# Altium PCB PCB.PcbDoc
Units mil, origin at the board's own origin, x right, y up, seen from the top; angles counter-clockwise.
Board outline 1710 x 660 mil, 2 copper layers (Top Layer, Bottom Layer); 11 components, 8 nets, 29 pads, 0 vias.
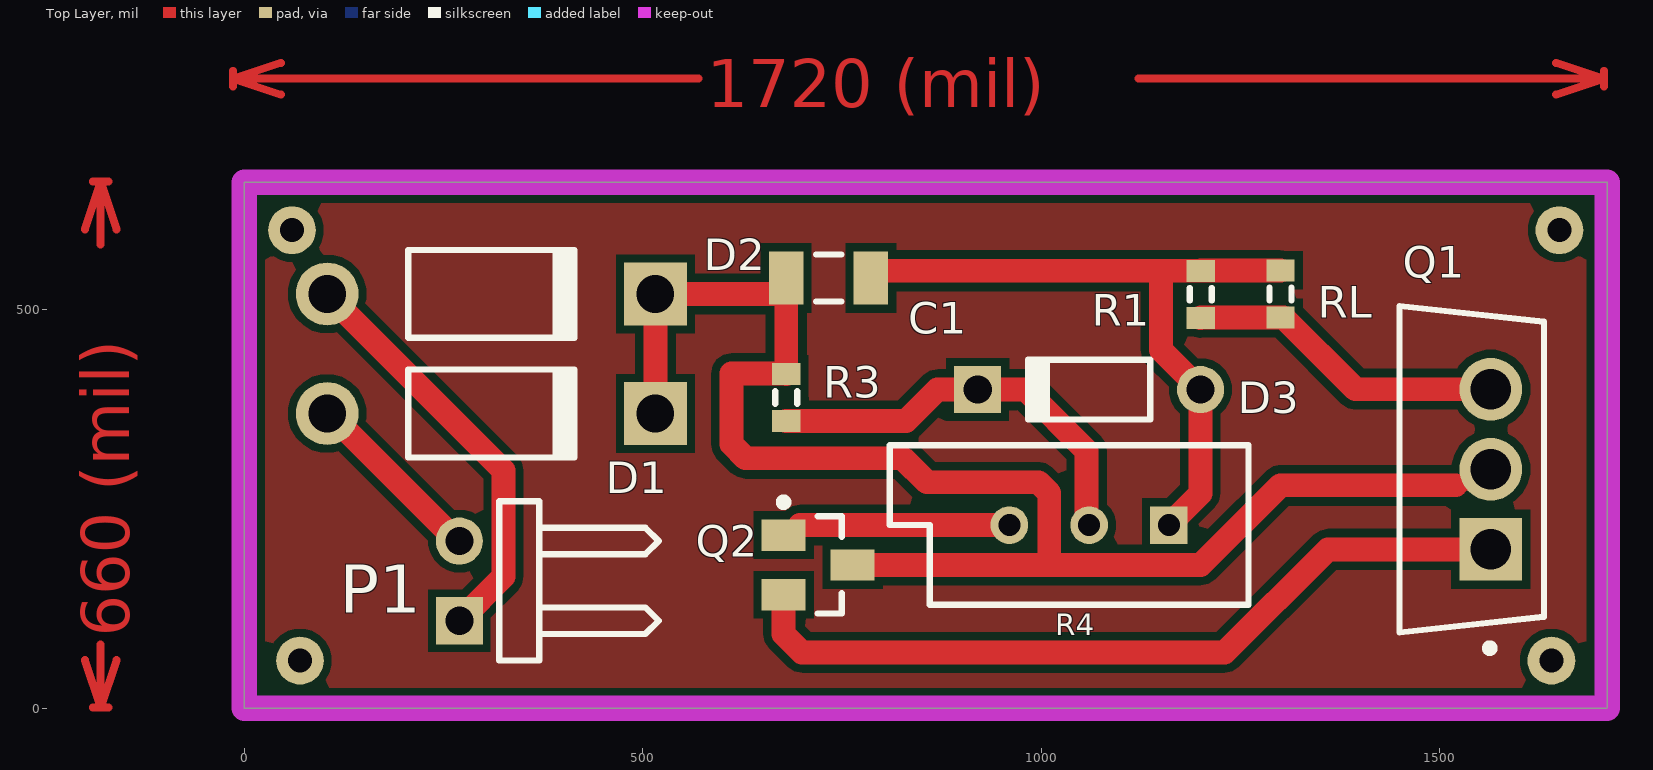
[diagram p0: Top Layer view]
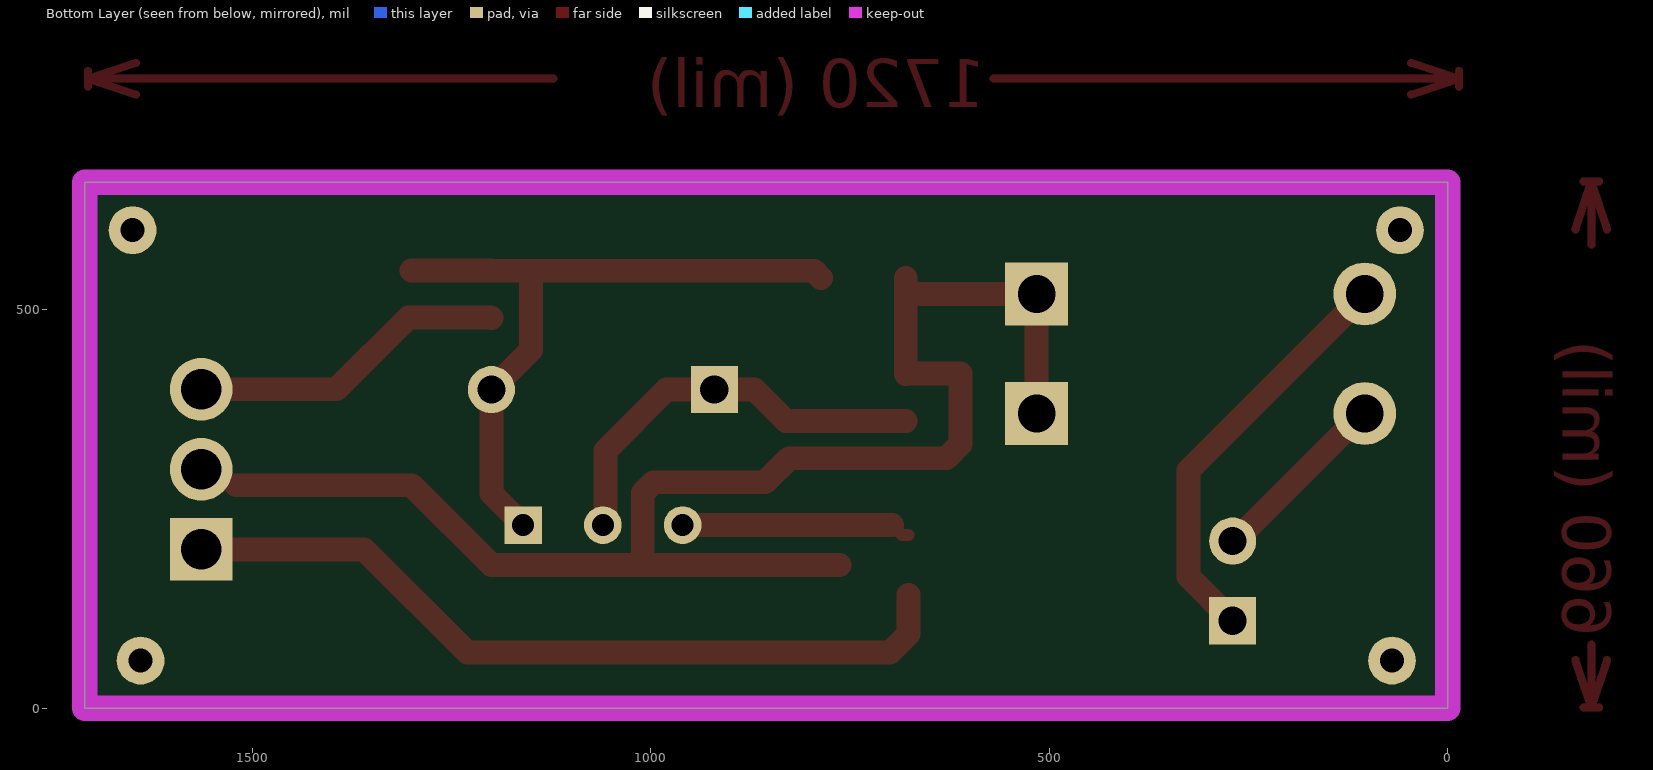
[diagram p1: Bottom Layer view, seen from below]

## Layer stack, top to bottom
Top Solder: solder mask 0.4, Solder Resist, Dk 3.5
Top Layer: signal copper 1.4
Dielectric 1: dielectric 12.6, FR-4, Dk 4.8
Bottom Layer: signal copper 1.4
Bottom Solder: solder mask 0.4, Solder Resist, Dk 3.5

## Board outline
0,0 0,660 1710,660 1710,0

## Design rules (kind name [scope] priority, off if disabled: settings)
Clearance [All] p1: gap=10 ignorepadtopadclearanceinfootprint=FALSE
PolygonConnect [All] p1: connectstyle=Relief reliefconductorwidth=10 reliefentries=4 polygonreliefangle="90 Angle" airgapwidth=10
RoutingVias [All] p1: holewidth=28 width=50 viastyle="Through Hole" minholewidth=28 minwidth=50 maxholewidth=28 maxwidth=50
SolderMaskExpansion [All] p1: expansion=4 istentingtop=FALSE
SupplyNets "Schematic Supply Nets" [InNet('GND')] p1: voltage=0.000
Width [All] p1: maxlimit=32 minlimit=10 preferedwidth=10
30 further rules are at their usual default settings.

## Components (designator, comment, footprint, x,y, rotation, side; value= is the part's Value field where it differs from the comment)
C1 "Cap Semi" C1206 733.15,540 r180 top value=100uF
D1 "Diode 1N4007" DO-41 310,370 r0 top
D2 "Diode 1N4007" DO-41 310,520 r0 top
D3 "BZX55C12" DO-35 1060,400 r180 top
P1 "Battery Connection 220V" HDR1X2H 270,110 r90 top
Q1 "TIP31C" FP-TO-220-P0A0015988-MFG 1540,300 r180 top
Q2 "MMBT3904" FAIR-SOT23-3_V 720,180 r0 top
R1 "Res3" J1-0603 1200,519.53 r270 top value=1k
R3 "Res3" J1-0603 680,390 r90 top value=2k
R4 "RPot" VR5 1060,230 r180 top value=1K
RL "Res3" J1-0603 1300,520 r270 top value=470

## Footprints (in the part's own frame and the unit in brackets; to place one, negate y for a bottom-side part, rotate by r counter-clockwise, add the part's x,y. Pads: shape width x height; smd on the part's side, far side on the other; paste and mask are expansions set on the pad)
C1206 [mm] "Chip Capacitor, Body 3.2x1.6mm, IPC High Density"
  rect 1.1x1.7 smd: 1(-1.35,0) 2(1.35,0)
  silkscreen extent -0.4,-0.75 0.4,0.75, body extent -1.7,-0.9 1.7,0.9, height 1.3
DO-35 [mm] "Diode, Axial; Body 3.8 x 1.9 mm (LxDia. max), Lead Dia. 0.53 mm (max)"
  round 1.5 hole 0.9: 1(-3.55,0)
  rect 1.5x1.5 hole 0.9: 2(3.55,0)
  silkscreen extent -1.95,-0.95 2.05,0.95
DO-41 [mm] "Diode, Axial; Body 5.2 x 2.7 mm (LxDia. max), Lead Dia. 0.86 mm (max)"
  round 2 hole 1.2: 1(-5.23,0)
  rect 2x2 hole 1.2: 2(5.23,0)
  silkscreen extent -2.65,-1.4 2.75,1.4
FAIR-SOT23-3_V [mm] "SOT23, 3-Leads, Body 3.12x1.5mm, Pitch 0.95mm"
  rect 1.4x1 smd: 1(-1.1,0.95) 2(-1.1,-0.95) 3(1.1,0)
  silkscreen extent -1.22,-1.55 0.75,2.12, body extent -1.35,-1.56 1.35,1.56, height 1.2
FP-TO-220-P0A0015988-MFG [mm]
  rect 2x2 hole 1.3 paste-2539.97 mask+0: 1(-0.607,2.55)
  round 2 hole 1.3 paste-2539.97 mask+0: 2(-0.607,0) 3(-0.607,-2.55)
  silkscreen extent -2.3,-5.2 2.3,5.82, body extent -2.4,-5.3 2.4,5.3, height 0.25
HDR1X2H [mm] "Connector; Header; 2 Position; Right Angle"
  rect 1.5x1.5 hole 0.9: 1(0,0)
  round 1.5 hole 0.9: 2(2.54,0)
  silkscreen extent -1.27,-6.35 3.81,-1.27
J1-0603 [mm] "Chip Resistor, Body 1.6x0.8mm, IPC High Density"
  rect 0.7x0.9 smd: 1(-0.75,0) 2(0.75,0)
  silkscreen extent -0.2,-0.35 0.2,0.35, body extent -0.85,-0.48 0.85,0.48, height 0.9
VR5 [mm] "Thru-Hole; 3 Leads"
  rect 1.2x1.2 hole 0.7: 1(-2.54,0)
  round 1.2 hole 0.7: 2(0,0) 3(2.54,0)
  silkscreen extent -5.08,-2.54 6.35,2.54

## Part data
C1: "Capacitor (Semiconductor SIM Model)", LatestRevisionDate=29-May-2009, LatestRevisionNote="IPC-7351 Footprint Added.", PackageDescription="Chip Capacitor", PackageReference=C1206, Published=8-Jun-2000, Publisher="Altium Limited"
D1 D2: "1 Amp General Purpose Rectifier", Code_JEDEC=DO-204-AL, ComponentLink1Description="Manufacturer Link", ComponentLink1URL=http://www.fairchildsemi.com/, ComponentLink2Description=Datasheet, ComponentLink2URL=http://www.fairchildsemi.com/ds/1N%2F1N4001.pdf, DatasheetVersion=1998, LatestRevisionDate=17-Jul-2002, LatestRevisionNote="Re-released for DXP Platform.", PackageDescription="Diode, Axial; Body 5.2 x 2.7 mm (LxDia. max), Lead Dia. 0.86 mm (max)", PackageReference=DO-41, PackageVersion=Aug-1999, Published=8-Jun-2000, Publisher="Altium Limited"
D3: "Silicon Epitaxial Planar Zener Diode (0.3 to 0.5W)", Code_JEDEC=DO-204-AH, ComponentLink1Description="Manufacturer Link", ComponentLink1URL=http://www.vishay.com/, ComponentLink2Description=Datasheet, ComponentLink2URL=http://www.vishay.com/docs/85604/85604.pdf, DatasheetDocument=1-Apr-1999, LatestRevisionDate=17-Jul-2002, LatestRevisionNote="Re-released for DXP Platform.", PackageReference=DO-35, Published=8-Jun-2000, Publisher="Altium Limited"
P1: library part "Header 2H", "Header, 2-Pin, Right Angle", frequency=50Hz, Voltage=220V, LatestRevisionDate=17-Jul-2002, LatestRevisionNote="Re-released for DXP Platform.", Publisher="Altium Limited"
Q1: library part CMP-12195-000001-1, "TRANS NPN 100V 3A TO-220", Collector Base Voltage=100V, Collector Emitter Saturation Voltage=1.2V, Emitter Base Voltage=5V, Manufacturer=STMicroelectronics, Max Collector Current=3A, Max Junction Temp=+150°C, Package=TO-220-P0A0015988, Power Dissipation=2W, Temperature="to +150°C", Automotive=No, Category=Trans, Collector Emitter Voltage=100V, ComponentLink2Description=Datasheet, ComponentLink2URL=https://www.st.com/resource/en/datasheet/tip31c.pdf, Device Class L1="Discrete Semiconductors", Device Class L2=Transistors, Device Class L3=BJTs, Digikey Description="TRANS NPN 100V 3A TO-220", Height=19.68mm, Hfe Max=50, Hfe Min=10, Hfe Testic=3A, Hfe Testvce=4V, Lead Free=Yes, Manufacturer Part Number=TIP31C, Mouser Description="Bipolar Transistors - BJT NPN Gen Pur Power", Number Of Elements=1, Number Of Npn=1, Octopart=https://octopart.com/tip31c-stmicroelectronics-15555, RoHS=TRUE, Standoff Height=3.5mm, Temperature Range High=+150°C
Q2: library part CMP-1670-00008-1, "NPN General Purpose Amplifier, 40 V, 0.2 A, -55 to 150 degC, 3-Pin SOT23, RoHS, Tape and Reel", Capacitance="1.8E-11 f", frequency="12.288 MHz", Frequency Tolerance=30ppm, Load Capacitance="18 pF", Max Operating Temperature=70degC, Min Operating Temperature=-20degC, Package Quantity=1000, ComponentLink1Description="Manufacturer URL", ComponentLink1URL=https://www.fairchildsemi.com/, ComponentLink2Description=Datasheet, ComponentLink2URL=https://www.fairchildsemi.com/datasheets/MM/MMBT3904.pdf, ComponentLink3Description="Package Specification", ComponentLink3URL=http://www.fairchildsemi.com/dwg/MA/MA03D.pdf, DatasheetVersion="Rev. 1.1.0, 10/2014", ESR="40 Ohm", Height="0.041 inch", Length="0.197 inch", Mount="Surface Mount", PackageDescription="3-Pin Small Outline Transistor, Body 2.92 x 1.325 mm, Pitch 0.95 mm", PackageReference=SOT23-3, Packaging="Tape and Reel", Pins=4, REACH SVHC="No SVHC", RoHSCompliant=True, Tolerance=30ppm, Width="0.126 inch"
R1 R3 RL: "Resistor", LatestRevisionDate=29-May-2009, LatestRevisionNote="IPC-7351 Footprint Added.", PackageDescription="Chip Resistor", PackageReference=J1-0603, Published=8-Jun-2000, Publisher="Altium Limited"
R4: "Potentiometer", LatestRevisionDate=17-Jul-2002, LatestRevisionNote="Re-released for DXP Platform.", PackageDescription="Variable Resistor, Thru-Hole; 3 Leads", PackageReference=VR5, Published=8-Jun-2000, Publisher="Altium Limited", Set Position=0.5, Sim Note="Enter the Resistance value and the set point into parameter fields."

## Free pads (board coordinates)
  round 60 hole 30: 8(1650,600) 9(1640,60) 10(70,60) 11(60,600)

## Nets (pads, with @x,y where several pads share a name; then routed paths per layer and width w, separated by ;. In a path a pad name is that pad's centre, name@x,y a point inside that pad or via, vN(x,y) a via of type N, cw(c..) or ccw(c..) an arc to the next point about the centre after c; other vN are vias at no path point)
GND: C1.1 D3.1 R1.1 R4.1 RL.1 | length 873.8
  Top Layer w30: C1.1 795.35,549.06 1150,549.06 ; R4.1 1199.76,269.76 D3.1 1150,449.76 1150,549.06 ; RL.1 1299.76,549.29 1200.24,549.29 R1.1 1150,549.06
NetC1_2: C1.2 D1.2 D2.2 Q1.2 Q2.3 R3.2 | length 2013.2
  Top Layer w20: 642.28,419.53 R3.2 ; 1000,180 1010,190 ; 1520,280 1522.91,282.91 1530.93,282.91 1548.02,300 Q1.2
  Top Layer w30: D1.2 D2.2 671.81,520 680,528.19 C1.2 R3.2 ; R3.2@679.53,420 611.14,420 611.14,331.46 628.72,313.89 826.22,313.89 856.38,283.73 996.38,283.73 1010,270.11 1010,190 ; Q2.3 1000,180 1200,180 1300,280 1520,280
NetD1_1: D1.1 P1.2 | length 232.2
  Top Layer w15: D1.1 D1.1@107.05,370 ; P1.2@267.05,210 P1.2
  Top Layer w30: D1.1@107.05,370 P1.2@267.05,210
NetD2_1: D2.1 P1.1 | length 524.7
  Top Layer w30: D2.1 325.53,298.57 325.53,165.53 P1.1
NetD3_2: D3.2 R3.1 R4.2 | length 519.5
  Top Layer w30: R3.1 830.47,360.47 870,400 980,400 1056.7,323.3 1056.7,233.3 R4.2
NetQ1_1: Q1.1 Q2.2 | length 999.9
  Top Layer w30: Q2.2 676.69,93.31 700,70 1230,70 1359.61,199.61 Q1.1
NetQ1_3: Q1.3 R1.2 RL.2 | length 401.4
  Top Layer w30: R1.2 1200.24,490.24 1299.76,490.24 RL.2 1303.94,490.47 1394.02,400.39 Q1.3
NetQ2_1: Q2.1 R4.3 | length 288.5
  Top Layer w15: Q2.1 684.57,217.4 Q2.1@697.17,230
  Top Layer w30: Q2.1@697.17,230 R4.3
copper on no net: | length 1912.3
  Top Layer w10: -200,60.92 -180,0.92 ; -200,600.92 -180,660.92 ; -190,0.92 -170,0.92 ; -190,660.92 -170,660.92 ; -180,80 -180,0.92 ; -180,581.85 -180,660.92 ; -160,60.92 -180,0.92 ; -160,600.92 -180,660.92 ; -14.08,780 -14.08,800 ; 45.92,770 -14.08,790 ; 45.92,810 -14.08,790 ; 570,790 -14.08,790 ; 1121.83,790 1705.92,790 ; 1645.92,770 1705.92,790 ; 1645.92,810 1705.92,790 ; 1705.92,780 1705.92,800

## Polygon pours and split planes (outlines as drawn)
no net on Top Layer "NONET_L01_P000" (solid, pour order 0): 1710,660 0,660 0,0 1710,0

## Keep-outs
Keep-Out Layer:
  the board outline again, w32

## Other copper
Top Layer:
  text "1720 (mil)" at 580,754.01 h60
  text "660 (mil)" at -144.01,90 h60 r90